# Altium PCB STM32_PCB.PcbDoc
Units mm, origin at the board's own origin, x right, y up, seen from the top; angles counter-clockwise.
Board outline 37.25 x 27 mm, 2 copper layers (Top Layer, Bottom Layer), stack 1.671 mm thick; 30 components, 26 nets, 137 pads, 120 vias.
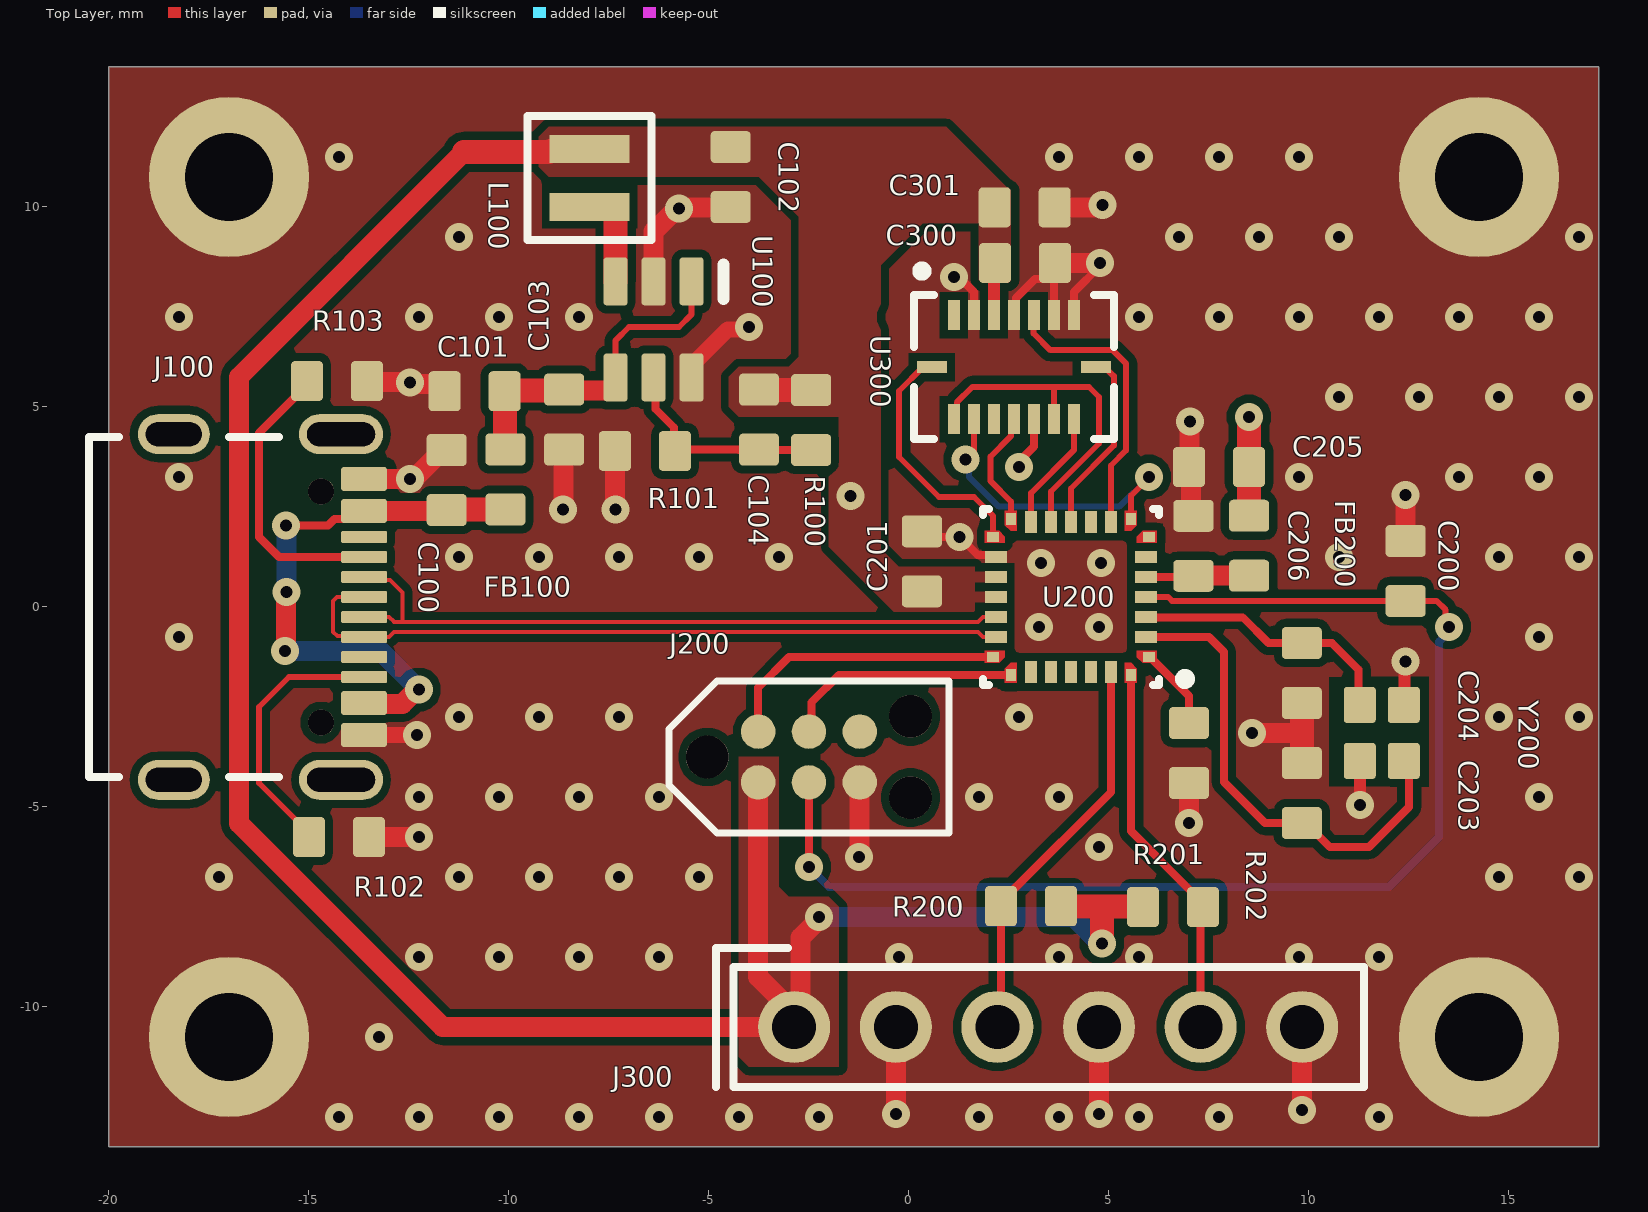
[diagram p0: Top Layer view]
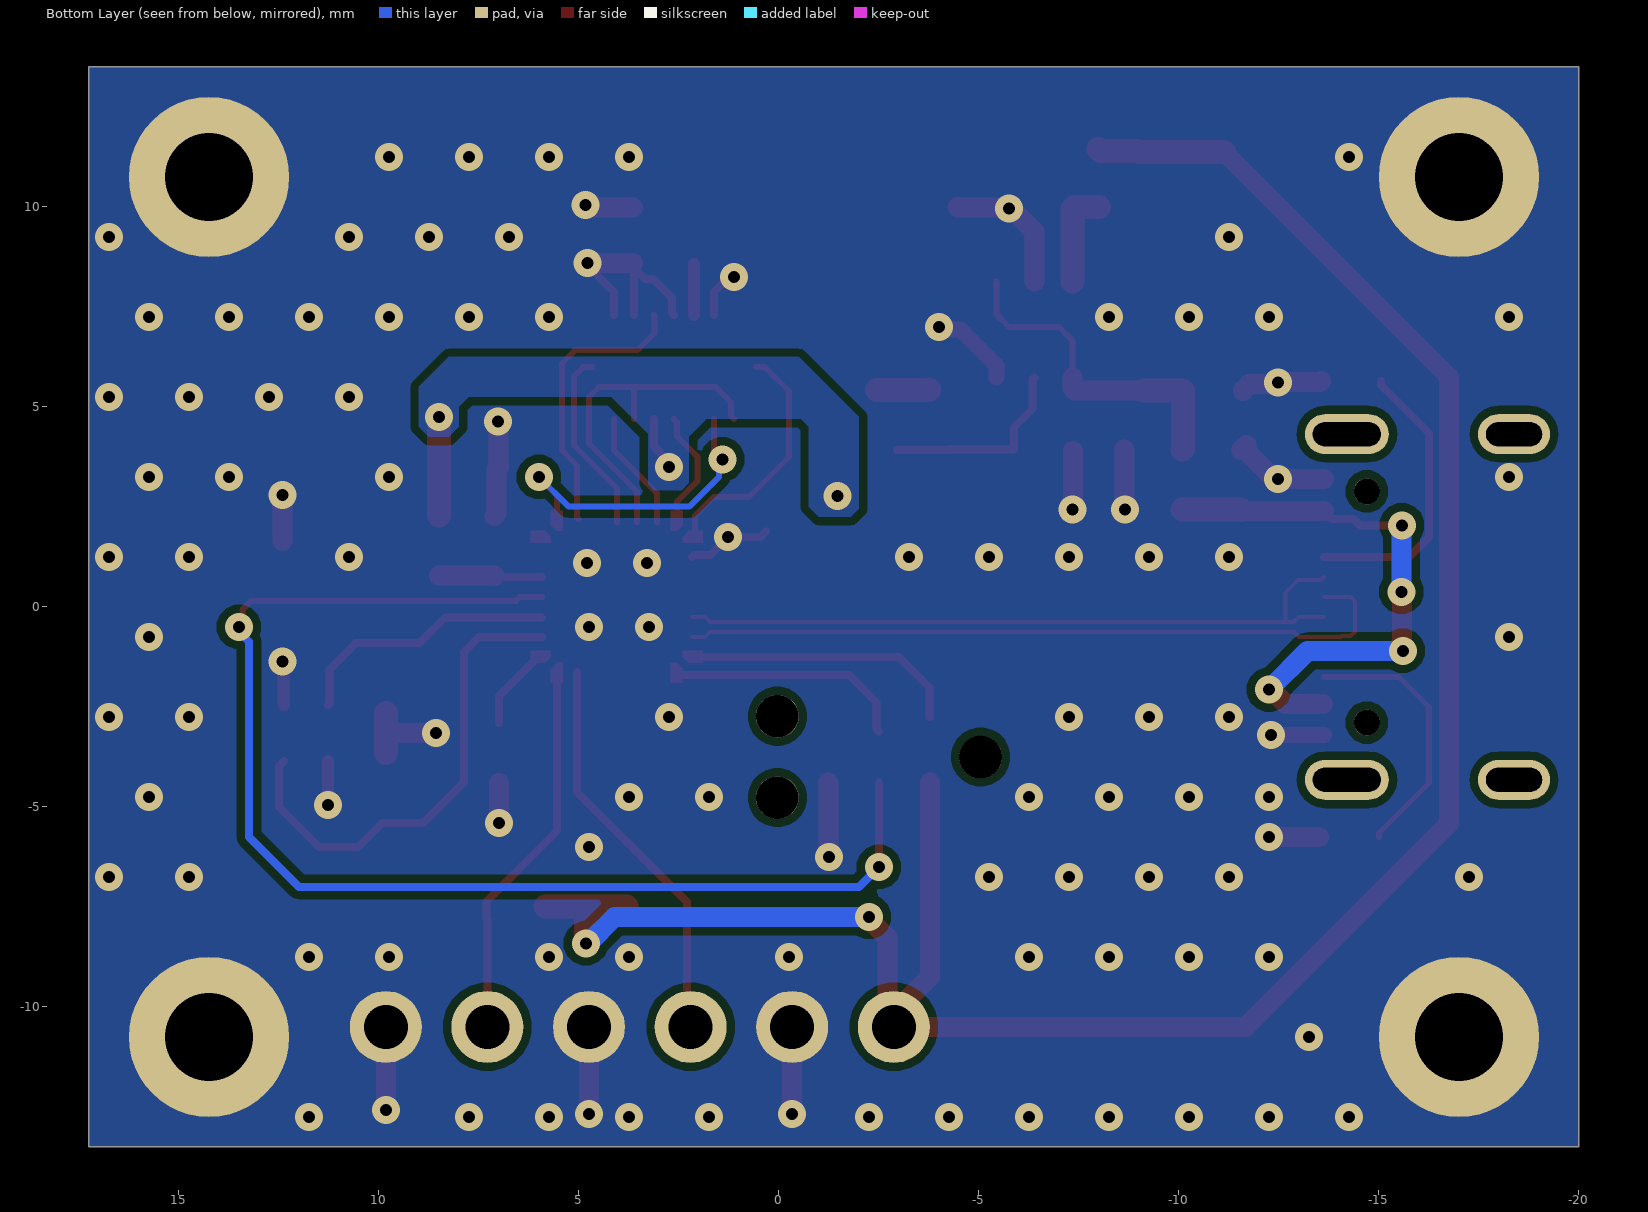
[diagram p1: Bottom Layer view, seen from below]
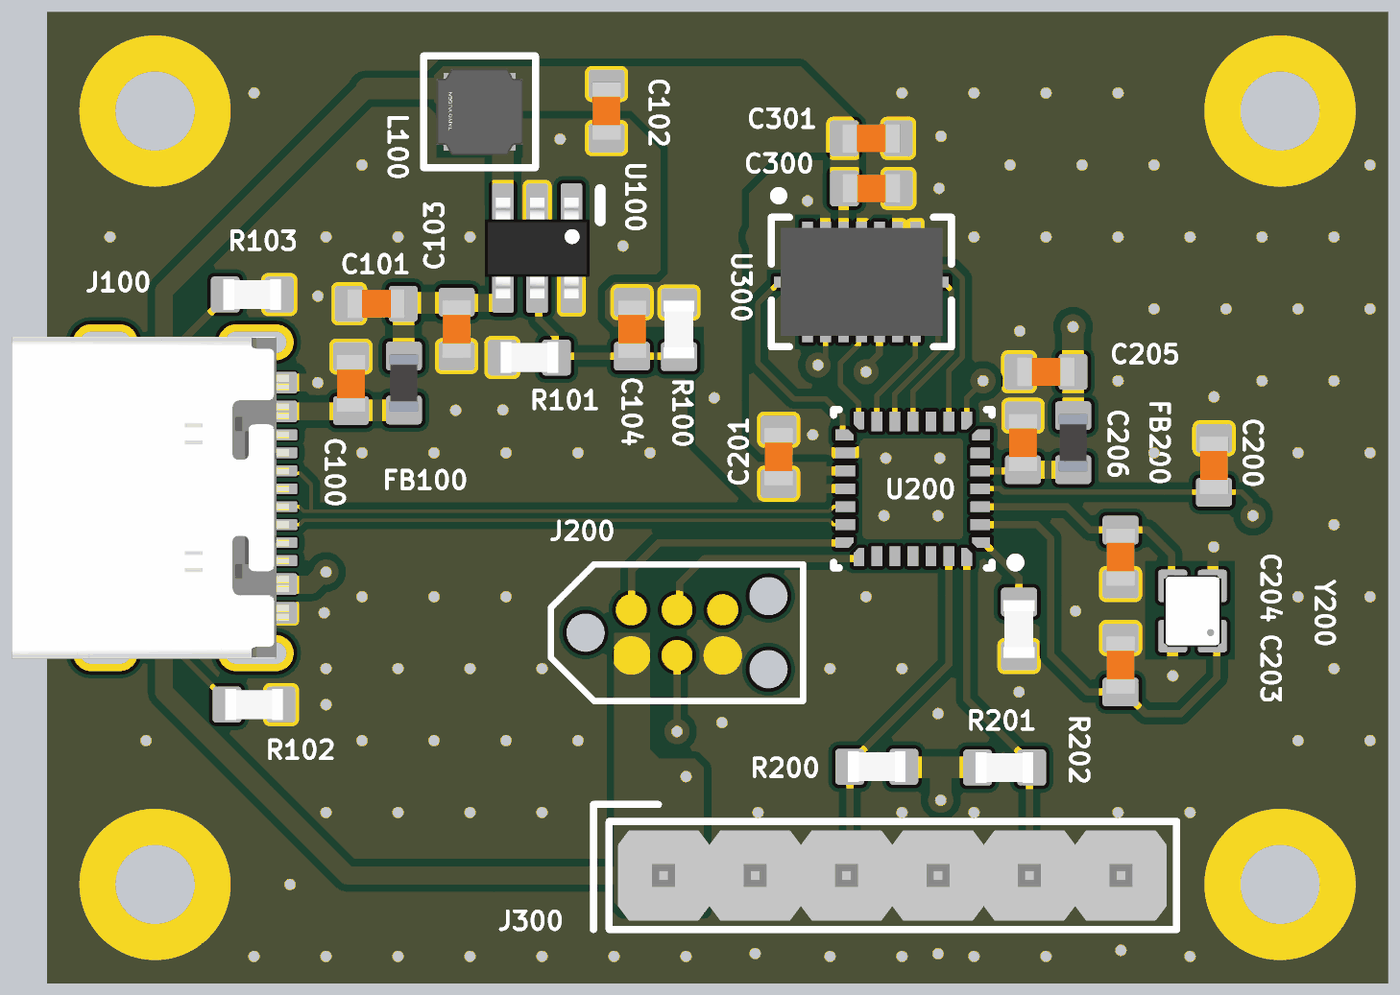
[diagram p2: 3D render of the assembled board from above, using the file's embedded part models]

## Layer stack, top to bottom
Top Solder: solder mask 0.0102, Solder Resist, Dk 3.5
Top Layer: signal copper 0.0356
Dielectric 1: dielectric 1.6, FR-4, Dk 4.1
Bottom Layer: signal copper 0.0356
Bottom Solder: solder mask 0.0102, Solder Resist, Dk 3.5

## Board outline
-20,-13.5 -20,13.5 17.25,13.5 17.25,-13.5

## Design rules (kind name [scope] priority, off if disabled: settings)
Clearance [All] p1: gap=0.2 ignorepadtopadclearanceinfootprint=TRUE except(0: Arc-Hole Track-Hole SMDPad-Hole THPad-Hole Via-Hole Fill-Hole Poly-Hole Region-Hole Text-Hole; 0.15: Arc-Arc Arc-Track Arc-SMDPad Track-Track Track-SMDPad SMDPad-SMDPad; 0.3: Arc-THPad Track-THPad SMDPad-THPad THPad-THPad)
DiffPairsRouting [All] p1: maxlimit=0.15 minlimit=0.15 mostfreqgap=0.15 toplayer_minwidth=0.1 toplayer_maxwidth=0.1 toplayer_prefwidth=0.1 bottomlayer_minwidth=0.1 bottomlayer_maxwidth=0.1 bottomlayer_prefwidth=0.1 maxuncoupledlength=12.7
MinimumSolderMaskSliver [All] p1: minsoldermaskwidth=0.127
PolygonConnect [All] p1: thpad.connectstyle=Relief thpad.reliefconductorwidth=0.254 thpad.reliefentries=4 thpad.polygonreliefangle="90 Angle" thpad.airgapwidth=0.254 smdpad.connectstyle=Relief smdpad.reliefconductorwidth=0.254 smdpad.reliefentries=4 smdpad.polygonreliefangle="90 Angle" smdpad.airgapwidth=0.254 via.connectstyle=Direct via.reliefconductorwidth=0.254 via.reliefentries=4 via.polygonreliefangle="90 Angle" via.airgapwidth=0.254
RoutingVias [All] p1: holewidth=0.3 width=0.7 viastyle="Through Hole" minholewidth=0.25 minwidth=0.6 maxholewidth=0.3 maxwidth=0.7
SilkToSilkClearance [All] p1: silktosilkclearance=0.127
SilkToSolderMaskClearance [IsPad] p1: minsilkscreentomaskgap=0.025 clearancetoexposedcopper=TRUE
SolderMaskExpansion [All] p1: expansion=0.102 istentingtop=FALSE
UnRoutedNet [All] p1: checkbadconnections=TRUE
Width [All] p1: maxlimit=1 minlimit=0.15 preferedwidth=0.3
25 further rules are at their usual default settings.

## Classes and differential pairs
differential pair class USB: USB_D
differential pair USB_D: +USB_D_P -USB_D_N

## Components (designator, comment, footprint, x,y, rotation, side; value= is the part's Value field where it differs from the comment)
C100 "100n" CAP_0603 -11.557,3.173 r270 top
C101 "100n" CAP_0603 -10.857,5.393 r0 top
C102 "4u7" CAP_0603 -4.458,10.75 r90 top
C103 "4u7" CAP_0603 -8.623,4.687 r90 top
C104 "22p" CAP_0603 -3.75,4.685 r90 top
C200 "100n" CAP_0603 12.416,0.9 r270 top
C201 "100n" CAP_0603 0.323,1.142 r270 top
C203 "10p" CAP_0603 9.82,-4.65 r270 top
C204 "10p" CAP_0603 9.82,-1.65 r90 top
C205 "100n" CAP_0603 7.75,3.5 r0 top
C206 "100n" CAP_0603 7.111,1.53 r270 top
C300 "100n" CAP_0603 2.9,8.6 r180 top
C301 "100n" CAP_0603 2.894,9.992 r180 top
FB100 "120R" FB_0603 -10.089,3.19 r90 top
FB200 "120R" FB_0603 8.505,1.531 r270 top
J100 "USB4105-GF-A-060" USB4105-GF-A-060 -16,0 r270 top
J200 "TC2030-NL" TC2030-NL-FP -2.5,-3.75 r0 top
J300 "G800W302018EU" G800W302018EU 3.48,-10.5 r90 top
L100 "10u" FP-NRH2412-MFG -7.986,10.729 r90 top
R100 "887k" RES_0603 -2.447,4.675 r90 top
R101 "280k" RES_0603 -6.601,3.898 r0 top
R102 "5k1" RES_0603 -14.25,-5.75 r180 top
R103 "5k1" RES_0603 -14.299,5.65 r180 top
R200 "5k1" RES_0603 3.051,-7.478 r0 top
R201 "5k1" RES_0603 6.6,-7.5 r180 top
R202 "5k1" RES_0603 7,-3.65 r270 top
U100 "LTC3405ES6#TRMPBF" SOT-23-6 -6.384,6.938 r180 top
U200 "STM32F042G6U6" STM-UFQFPN28_V 4.05,0.25 r180 top
U300 "BMI088" BMI088 2.623,5.997 r0 top
Y200 "FA-12824.0000MF10Z-W3" EPSON-FA-128_V 11.82,-3.15 r180 top

## Footprints (in the part's own frame and the unit in brackets; to place one, negate y for a bottom-side part, rotate by r counter-clockwise, add the part's x,y. Pads: shape width x height; smd on the part's side, far side on the other; paste and mask are expansions set on the pad)
BMI088 [mm]
  rect 0.3x0.75 smd: 1(-1.5,1.3) 2(-1,1.3) 3(-0.5,1.3) 4(0,1.3) 5(0.5,1.3) 6(1,1.3) 7(1.5,1.3) 9(1.5,-1.3) 10(1,-1.3) 11(0.5,-1.3) 12(0,-1.3) 13(-0.5,-1.3) 14(-1,-1.3) 15(-1.5,-1.3)
  rect 0.75x0.3 smd: 8(2.05,0) 16(-2.05,0)
  silkscreen extent -2.5,-1.8 2.5,2.51, body extent -2.25,-1.5 2.25,1.5, height 1.01
CAP_0603 [mm]
  rrect25% 0.8x1 smd: 1(-0.75,0) 2(0.75,0)
  body extent -0.8,-0.4 0.8,0.4, height 0.51
EPSON-FA-128_V [mm] "SMD, 4-Leads, Body 2x1.6mm, Pitch 1.45mm"
  rrect20% 0.8x0.9 smd: 1(-0.55,0.7) 2(-0.55,-0.7) 3(0.55,-0.7) 4(0.55,0.7)
  body extent -0.8,-1 0.8,1, height 0.4
FB_0603 [mm]
  rrect25% 0.8x1 smd: 1(-0.75,0) 2(0.75,0)
  body extent -0.8,-0.4 0.8,0.4, height 0.81
FP-NRH2412-MFG [mm]
  rect 0.7x2 smd paste+0 mask+0: 1(-0.725,0) 2(0.725,0)
  silkscreen extent -1.55,-1.55 1.55,1.55, body extent -1.35,-1.35 1.35,1.35, height 0.25
G800W302018EU [mm]
  round 1.8 hole 1.1 mask+0.07: 1(0,6.35) 2(0,3.81) 3(0,1.27) 4(0,-1.27) 5(0,-3.81) 6(0,-6.35)
  silkscreen extent -1.5,-7.9 1.97,8.3, body extent -1.25,-7.62 1.25,7.62, height 8.61
RES_0603 [mm]
  rrect25% 0.8x1 smd: 1(-0.75,0) 2(0.75,0)
  body extent -0.8,-0.43 0.8,0.43, height 0.52
SOT-23-6 [mm]
  rrect25% 0.6x1.2 smd: 1(-0.95,-1.2) 2(0,-1.2) 3(0.95,-1.2) 4(0.95,1.2) 5(0,1.2) 6(-0.95,1.2)
  silkscreen extent -1.75,-1.63 -1.75,-0.76, body extent -1.45,-1.4 1.45,1.4, height 1.45
STM-UFQFPN28_V [mm] "QFN, 28-Leads, Body 4.1x4.1mm, Pitch 0.5mm"
  rect 0.3x0.25 smd: 1(-1.95,1.5) 7(-1.95,-1.5) 15(1.95,-1.5) 21(1.95,1.5)
  rect 0.55x0.3 smd: 2(-1.875,1) 3(-1.875,0.5) 4(-1.875,0) 5(-1.875,-0.5) 6(-1.875,-1) 16(1.875,-1) 17(1.875,-0.5) 18(1.875,0) 19(1.875,0.5) 20(1.875,1)
  rect 0.25x0.3 smd: 8(-1.5,-1.95) 14(1.5,-1.95) 22(1.5,1.95) 28(-1.5,1.95)
  rect 0.3x0.55 smd: 9(-1,-1.875) 10(-0.5,-1.875) 11(0,-1.875) 12(0.5,-1.875) 13(1,-1.875) 23(1,1.875) 24(0.5,1.875) 25(0,1.875) 26(-0.5,1.875) 27(-1,1.875)
  Top Layer region: -2.15,-1.35 -1.65,-1.35 -1.65,-1.505 -1.795,-1.65 -2.15,-1.65
  Top Layer region: -1.35,-2.15 -1.35,-1.65 -1.505,-1.65 -1.65,-1.795 -1.65,-2.15
  Top Layer region: -1.35,2.15 -1.35,1.65 -1.505,1.65 -1.65,1.795 -1.65,2.15
  Top Layer region: 1.35,-2.15 1.35,-1.65 1.505,-1.65 1.65,-1.795 1.65,-2.15
  Top Layer region: 2.15,1.35 1.65,1.35 1.65,1.505 1.795,1.65 2.15,1.65
  Top Layer region: -2.15,1.35 -1.65,1.35 -1.65,1.505 -1.795,1.65 -2.15,1.65
  Top Layer region: 2.15,-1.35 1.65,-1.35 1.65,-1.505 1.795,-1.65 2.15,-1.65
  Top Layer region: 1.35,2.15 1.35,1.65 1.505,1.65 1.65,1.795 1.65,2.15
  silkscreen extent -2.98,-2.2 2.2,2.2, body extent -2.05,-2.05 2.05,2.05, height 0.6
TC2030-NL-FP [mil]
  round 33.98 smd paste-16.99: 1(-50,-25) 2(-50,25) 3(0,-25) 4(0,25) 5(50,-25) 6(50,25)
  round 42.01 hole 42.01 unplated: MH(-100,0) MH(100,-40) MH(100,40)
  silkscreen extent -138,-75 138,75
USB4105-GF-A-060 [mm]
  rrect25% 0.6x1.15 smd mask+0.05: A1B12(-3.2,2.378) A4B9(-2.4,2.378) B1A12(3.2,2.378) B4A9(2.4,2.378)
  rrect25% 0.3x1.15 smd mask+0.05: A5(-1.25,2.378) A6(-0.25,2.378) A7(0.25,2.378) A8(1.25,2.378) B5(1.75,2.378) B6(0.75,2.378) B7(-0.75,2.378) B8(-1.75,2.378)
  round 0.65 hole 0.65 unplated mask+0.05: MH(-2.89,1.303) MH(2.89,1.303)
  oval 1x2.1 hole 0.6 slot 1.7 at 90 deg: SH(-4.32,1.803) SH(4.32,1.803)
  oval 1x1.8 hole 0.6 slot 1.4 at 90 deg: SH(-4.32,-2.377) SH(4.32,-2.377)
  silkscreen extent -4.25,-4.5 4.25,0.25, body extent -4.47,-4.97 4.47,2.73, height 3.27

## Part data
C100 C101 C102 C103 C104 C200 C201 C205 C206: library part CAP_0603, "Capacitor SMD 0603"
C203 C204 C300 C301: library part CMP-001-00087-1, "Capacitor SMD 0603", Design Item ID=CAP_0603, Source=Schematic-Lib-PhilsLab.SchLib
FB100 FB200: library part FB_0603, "Ferrite Bead SMD 0603"
J100: "USB Connector Type C SMT 12 Pin", Manufacturer=GCT, Distributor Link=https://eu.mouser.com/ProductDetail/GCT/USB4105-GF-A-060?qs=QNEnbhJQKvY2mocwNJzgfA%3D%3D, Manufacturer Part Number=USB4105-GF-A-060
J200: library part CMP-002-00087-1, "Tag-Connect No-Solder SWD Debug Connector (No Legs) DO NOT PLACE", Manufacturer=Tag-Connect, Manufacturer Part Number=TC2030-NL-FP, Design Item ID=TC2030-NL, Source=Schematic-Lib-PhilsLab.SchLib
J300: library part CMP-002-00116-1, "Pin Header 6 Position 2.54mm Pitch", Manufacturer=Amphenol, Design Item ID=G800W302018EU, Manufacturer Part Number=G800W302018EU, Source=Schematic-Lib-PhilsLab.SchLib
L100: library part CMP-14484-000582-1, "Shielded Wirewound Inductor 10uH 20% 0.51A 0.72Ω SMD", Case/Package=Nonstandard, Current Rating=450mA, DC Resistance (DCR)=600mR, Inductance=10uH, Max DC Current=810mA, Max Operating Temperature=120°C, Min Operating Temperature=-25°C, Package Quantity=2500, Self Resonant Frequency=29MHz, Test Frequency=100kHz, Tolerance=20%, Core Material=Ferrite, Halogen Free="Halogen Free", Height=1.2mm, Height - Seated (Max)=0.047inch, Length=0.095inch, Mount="Surface Mount", Packaging="Tape and Reel", RoHS Compliant=Yes, Saturation Current=810mA, Shielding=Shielded, Termination=SMD/SMT, Width=0.095inch
R100 R101 R200 R201 R202: library part CMP-009-00183-1, "Resistor SMD 0603", Design Item ID=RES_0603, Source=Schematic-Lib-PhilsLab.SchLib
R102 R103: library part RES_0603, "Resistor SMD 0603"
U100: "1.5MHz, 300mA / Synchronous Step-Down / Regulator in ThinSOT", Manufacturer="Analog Devices", Manufacturer Part Number=LTC3405ES6#TRMPBF
U200: library part CMP-0304-00112-2, "ARM Cortex-M0 32-bit MCU, 32 KB Flash, 6 KB Internal RAM, 24 I/Os, 28-Pin UFQFPN, -40 to 85 degC, Tray", I/Os (High Current)=24, Manufacturer=STMicroelectronics, Operating Frequency(F) (Processor speed) (MHz)=48, Package Description="28-Pin Ultra Thin Fine Pitch Quad Flat No-Lead, 4 x 4 x 0.6 mm Body, 0.5 mm Pitch", Package Reference=UFQFPN28, Supply Voltage(Vcc) min (V)=2, ComponentLink1Description="Manufacturer URL", ComponentLink1URL=http://www.st.com/, ComponentLink2Description=Datasheet, ComponentLink2URL=http://www.st.com/st-web-ui/static/active/en/resource/technical/document/datasheet/DM00105814.pdf, Core="ARM Cortex-M0", DatasheetVersion="Rev. 5", FLASH Size (Prog) (kB)=32, Internal RAM Size (kB)=6, Mounting Technology="Surface Mount", Packing=Tray, PartNumber=STM32F042G6U6
U300: library part CMP-028-000011-1, "Inertial Measurement Unit IMU 6-Axis LGA", Manufacturer=Bosch, Design Item ID=BMI088, Manufacturer Part Number=BMI088, Source=Schematic-Lib-PhilsLab.SchLib
Y200: library part CMP-003-00028-1, "Crystal, 24 MHz, +/- 10 ppm, -20 to 75 degC, 4-Pin SMD, RoHS, Tape and Reel", Case/Package=SMD/SMT, Frequency=24MHz, Load Capacitance=12pF, Max Operating Temperature=75°C, Min Operating Temperature=-20°C, ESR=80, Mounting Technology=SMT, Pins=4, RoHS Compliant=Yes

## Free pads (board coordinates)
  round 4 hole 2.2: MH(14.25,10.75) MH1(14.25,-10.75) MH2(-17,-10.75) MH3(-17,10.75)

## Via types
v1: diameter 0.7, hole 0.3, Top Layer to Bottom Layer, tented both sides, 120 vias

## Nets (pads, with @x,y where several pads share a name; then routed paths per layer and width w, separated by ;. In a path a pad name is that pad's centre, name@x,y a point inside that pad or via, vN(x,y) a via of type N, cw(c..) or ccw(c..) an arc to the next point about the centre after c; other vN are vias at no path point)
+3V3: C102.2 C104.2 C201.2 C205.2 C300.2 C301.2 FB200.1 J200.1 J300.1 L100.2 R100.2 R200.2 R201.2 U200.17 U200.18 U300.3 U300.11 | length 64.5
  Top Layer w0.2: C300.2@2.123,8.573 C300.2 ; v1(2.75,3.5) 2.75,3.635 3.123,4.009 U300.11
  Top Layer w0.3: U300.3 C300.2@2.123,8.573
  Top Layer w0.5: -11.128,11.372 -16.75,5.75 -16.75,-5.407 -11.657,-10.5 J300.1 ; J200.1 -3.77,-9.248 -2.87,-10.148 J300.1 ; v1(-2.25,-7.75) -2.25,-7.804 -2.707,-8.261 -2.707,-10.337 J300.1
  Top Layer w0.6: -11.128,11.372 -8.994,11.372 -8.962,11.404 -8.036,11.404 L100.2 ; C104.2 -3.745,5.43 -2.452,5.43 R100.2 ; R200.2@3.812,-7.489 4.825,-7.489 ; v1(4.825,-8.408) 4.825,-7.489 ; R201.2@5.839,-7.489 4.825,-7.489 ; v1(8.5,4.75) C205.2 8.503,3.497 8.503,2.284 FB200.1
  Bottom Layer w0.5: v1(-2.25,-7.75) 4.113,-7.75 4.771,-8.408 v1(4.825,-8.408)
  other v1: -1.466,2.777
+3V3A: C206.2 FB200.2 U200.5 | length 2.6
  Top Layer w0.2: U200.5 7.081,0.75 C206.2
  Top Layer w0.5: C206.2 FB200.2@8.505,0.781
+5: C101.2 C103.2 FB100.2 U100.1 U100.4 | length 8.3
  Top Layer w0.15: U100.4 -7.334,6.666 -7,7 -5.75,7 -5.434,7.316 U100.1
  Top Layer w0.5: -9.123,5.415 -7.384,5.415 -7.334,5.465 U100.4
  Top Layer w0.6: C101.2 -10.085,5.415 -9.123,5.415 ; C101.2@-10.096,5.291 -10.096,3.946 FB100.2
+VUSB: C100.2 FB100.1 J100.A4B9 J100.B4A9 | length 14
  Top Layer w0.2: v1(-15.572,2.04) -14.522,2.04 -14.362,2.2 -13.822,2.2 J100.A4B9
  Top Layer w0.5: v1(-15.595,-1.097) -15.578,-1.079 -15.578,0.362 v1(-15.561,0.379) ; J100.A4B9 C100.2@-11.58,2.4 ; J100.B4A9@-13.599,-2.423 -12.662,-2.423 -12.305,-2.066 v1(-12.251,-2.066)
  Top Layer w0.6: C100.2 -11.549,2.431 -10.097,2.431 FB100.1
  Bottom Layer w0.5: v1(-15.595,-1.097) -13.219,-1.097 v1(-12.251,-2.066) ; v1(-15.572,2.04) -15.566,2.034 -15.566,0.385 v1(-15.561,0.379)
BOOT0: R202.1 U200.1 | length 2.1
  Top Layer w0.2: U200.1 6.025,-1.25 7,-2.225 R202.1
BUCK_SW: L100.1 U100.3 | length 2.5
  Top Layer w0.6: L100.1@-8,10 -7.384,10 -7.334,9.95 U100.3
BUCK_VFB: C104.1 R100.1 R101.2 U100.5 | length 4.9
  Top Layer w0.2: U100.5 -6.342,5.697 -6.342,4.955 -5.88,4.493 R101.2@-5.88,3.936 ; R101.2@-5.861,3.924 -5.85,3.935 -4.25,3.935 -4.245,3.93 -3.75,3.93 -2.952,3.93 R100.1@-2.947,3.925
GND: C100.1 C101.1 C102.1 C103.1 C200.1 C201.1 C203.1 C204.1 C205.1 C206.1 C300.1 C301.1 J100.A1B12 J100.B1A12 J200.5 J300.2 J300.4 J300.6 pad.MH pad.MH1 pad.MH2 pad.MH3 R101.1 R102.1 R103.1 R202.2 U100.2 U100.6 U200.16 U300.2 U300.4 U300.6 U300.7 Y200.2 Y200.4 | length 42.8
  Top Layer w0.2: C201.1 0.465,1.75 v1(1.269,1.75) 1.719,1.3 2.125,1.3 U200.16 ; v1(1.125,8.25) 1.25,8.25 1.623,7.877 U300.2 ; U300.4 2.673,7.347 2.673,7.725 3.148,8.2 3.35,8.2 C300.1@3.623,8.473 ; U300.6 C300.1@3.623,8.473 ; C300.1 3.623,8.573 C300.1@3.623,8.473 ; U300.7 4.123,7.873 4.782,8.532 v1(4.782,8.6)
  Top Layer w0.3: v1(11.27,-4.95) Y200.4 ; Y200.2 12.39,-2.43 12.39,-1.384 v1(12.41,-1.364)
  Top Layer w0.4: J100.B1A12 v1(-12.3,-3.2) ; U100.6 -5.434,6.038 -4.53,6.942 -4.059,6.942 v1(-4.001,6.999)
  Top Layer w0.5: J100.A1B12 v1(-12.48,3.2) -12.442,3.238 -12.342,3.238 -11.683,3.897 -11.683,4.049 C100.1 ; R103.1 -13.527,5.628 -12.497,5.628 v1(-12.475,5.606) -12.437,5.568 -11.757,5.568 -11.607,5.418 C101.1 ; R102.1 v1(-12.25,-5.75) ; v1(-8.648,2.431) -8.635,2.444 -8.635,3.924 C103.1 ; R101.1 -7.345,3.892 -7.345,2.447 v1(-7.339,2.441) ; U100.2 -6.384,9.384 -5.801,9.967 v1(-5.747,9.967) -5.731,9.983 -4.474,9.983 C102.1 ; v1(-1.25,-6.25) -1.24,-6.24 -1.24,-4.395 J200.5 ; v1(-0.33,-12.67) J300.2 ; C301.1 4.778,9.992 v1(4.834,10.048) ; C300.1 v1(4.782,8.6) ; v1(4.75,-12.676) J300.4@4.75,-11 ; v1(7,-5.4) R202.2 ; v1(7.022,4.631) 7.011,4.62 7.011,3.511 C205.1 7.056,3.444 7.056,2.336 C206.1 ; v1(8.57,-3.15) 9.822,-3.15 9.825,-3.152 ; v1(9.83,-12.58) J300.6 ; C200.1 v1(12.416,2.804)
  Top Layer w0.6: C204.1@9.82,-2.65 9.825,-2.654 9.825,-3.152 C203.1@9.825,-3.65
  other v1: -14.25,-12.75 -12.25,-12.75 -10.25,-12.75 -8.25,-12.75 -6.25,-12.75 -4.25,-12.75 -2.25,-12.75 1.75,-12.75 3.75,-12.75 5.75,-12.75 7.75,-12.75 11.75,-12.75 -13.25,-10.75 -12.25,-8.75 -10.25,-8.75 -8.25,-8.75 -6.25,-8.75 -0.25,-8.75 3.75,-8.75 5.75,-8.75 9.75,-8.75 11.75,-8.75 -17.25,-6.75 -11.25,-6.75 -9.25,-6.75 -7.25,-6.75 -5.25,-6.75 14.75,-6.75 16.75,-6.75 4.75,-6 -12.25,-4.75 -10.25,-4.75 -8.25,-4.75 -6.25,-4.75 1.75,-4.75 3.75,-4.75 15.75,-4.75 -11.25,-2.75 -9.25,-2.75 -7.25,-2.75 2.75,-2.75 14.75,-2.75 16.75,-2.75 -18.25,-0.75 15.75,-0.75 3.25,-0.5 4.75,-0.5 3.3,1.1 4.8,1.1 -11.25,1.25 -9.25,1.25 -7.25,1.25 -5.25,1.25 -3.25,1.25 10.75,1.25 14.75,1.25 16.75,1.25 -18.25,3.25 9.75,3.25 13.75,3.25 15.75,3.25 10.75,5.25 12.75,5.25 14.75,5.25 16.75,5.25 -18.25,7.25 -12.25,7.25 -10.25,7.25 -8.25,7.25 5.75,7.25 7.75,7.25 9.75,7.25 11.75,7.25 13.75,7.25 15.75,7.25 -11.25,9.25 6.75,9.25 8.75,9.25 10.75,9.25 16.75,9.25 -14.25,11.25 3.75,11.25 5.75,11.25 7.75,11.25 9.75,11.25
I2C_SCL: J300.3 R200.1 U200.27 | length 10.4
  Top Layer w0.2: J300.3@2.21,-11 2.301,-10.909 R200.1@2.301,-7.628 ; R200.1 2.301,-7.378 2.601,-7.078 2.602,-7.078 5.05,-4.63 U200.27
I2C_SDA: J300.5 R201.1 U200.28 | length 10
  Top Layer w0.2: U200.28 5.55,-5.604 7.046,-7.1 7.05,-7.1 7.317,-7.367 7.317,-7.783 7.29,-7.81 J300.5@7.29,-11
IMU_INT1: U200.15 U300.16 | length 6.2
  Top Layer w0.15: U300.16 0.348,5.997 -0.25,5.398 -0.25,3.75 0.75,2.75 1.627,2.75 2.1,2.277 U200.15
IMU_INT2: U200.14 U300.12 | length 2.9
  Top Layer w0.15: U200.14 2.55,2.634 2.041,3.143 2.041,3.761 2.548,4.269 2.548,4.622 U300.12
IMU_MISO: U200.12 U300.10 U300.15 | length 8.7
  Top Layer w0.15: U300.15 1.198,4.772 1.198,5.115 1.584,5.5 3.659,5.5 ; U200.12 3.55,2.886 4.75,4.086 4.75,5.25 4.5,5.5 3.659,5.5 ; U300.10 3.623,5.464 3.659,5.5
IMU_MOSI: U200.13 U300.9 | length 3
  Top Layer w0.15: U200.13 3.05,2.846 4.123,3.919 U300.9
IMU_NCC_ACC: U200.8 U300.14 | length 7.9
  Top Layer w0.15: v1(1.416,3.688) 1.495,3.768 1.495,3.787 1.623,3.915 U300.14 ; U200.8 5.55,2.781 6,3.231 v1(6,3.25)
  Bottom Layer w0.15: v1(1.416,3.688) 1.495,3.609 1.495,3.255 2.244,2.506 5.256,2.506 v1(6,3.25)
IMU_NCC_GYR: U200.9 U300.5 | length 7.1
  Top Layer w0.15: U300.5 3.118,7.291 3.118,6.838 3.536,6.42 5.093,6.42 5.423,6.09 5.423,3.911 5.05,3.538 5.05,2.227 U200.9@5.017,2.193
IMU_SCK: U200.11 U300.8 | length 4.6
  Top Layer w0.15: U200.11 4.05,2.962 5.123,4.036 5.123,5.772 4.898,5.997 U300.8
NRST: C200.2 J200.3 U200.4 | length 32
  Top Layer w0.15: U200.4 6.482,0.25 6.577,0.155 13.188,0.155 13.415,-0.072 13.415,-0.415 v1(13.5,-0.5)
  Top Layer w0.2: v1(-2.5,-6.5) J200.3
  Bottom Layer w0.2: v1(-2.5,-6.5) -2,-7 12,-7 13.25,-5.75 13.25,-0.867 13.5,-0.617 v1(13.5,-0.5)
OSC_IN: C203.2 U200.2 Y200.1 | length 12.3
  Top Layer w0.2: U200.2 7.5,-0.75 7.875,-1.125 7.875,-4.375 8.9,-5.4 C203.2 9.92,-5.4 10.52,-6 11.5,-6 12.5,-5 12.5,-3.98 Y200.1
OSC_OUT: C204.2 U200.3 Y200.3 | length 6.7
  Top Layer w0.2: U200.3@5.932,-0.257 8.342,-0.257 8.985,-0.9 10.57,-0.9 11.238,-1.567 11.238,-2.417 Y200.3
SWCLK: J200.4 U200.22 | length 6
  Top Layer w0.2: J200.4 -2.434,-3.049 -2.434,-2.384 -1.75,-1.7 U200.22
SWDIO: J200.2 U200.21 | length 6.9
  Top Layer w0.2: J200.2@-3.77,-2.75 -3.768,-2.748 -3.768,-2.018 -3,-1.25 U200.21
USB_CC1: J100.A5 R103.2 | length 7.2
  Top Layer w0.2: R103.2 -15.049,5.55 -16.25,4.349 -16.25,1.75 -15.75,1.25 J100.A5
USB_CC2: J100.B5 R102.2 | length 6.7
  Top Layer w0.15: R102.2 -15,-5.65 -16.25,-4.4 -16.25,-2.5 -15.5,-1.75 J100.B5
USB_D_N: J100.A7 J100.B7 U200.19 | length 17.7
  Top Layer w0.1: J100.A7 -13.373,-0.25 -13.198,-0.25 -13.137,-0.25 -12.998,-0.25 -12.88,-0.368 ; J100.B7 -13.552,0.68 -12.977,0.68 -12.664,0.366 -12.664,-0.375 1.725,-0.375 1.85,-0.25 U200.19 ; -12.872,-0.375 -12.674,-0.375
USB_D_P: J100.A6 J100.B6 U200.20 | length 18.3
  Top Layer w0.1: J100.A6 -14.295,0.25 -14.397,0.148 -14.397,-0.62 -14.289,-0.729 -14.069,-0.729 -14.048,-0.75 -12.998,-0.75 -12.872,-0.625 1.725,-0.625 1.85,-0.75 U200.20
pads on no net: J100.A8 J100.B8 J100.MH J100.SH J200.6 J200.MH U200.6 U200.7 U200.10 U200.23 U200.24 U200.25 U200.26 U300.1 U300.13

## Polygon pours and split planes (outlines as drawn)
GND on Top Layer "GND_L01_P027" (solid, remove dead copper, pour order 27): -20,-13.5 -20,13.5 17.25,13.5 17.25,-13.5
+3V3 on Top Layer "Top Layer-+3V3" (solid, remove dead copper, pour order 20): -4.5,5 -4.25,4.75 -1.75,4.75 -1.75,3.5 -2,3.25 -2,1.5 -0.38,-0.12 1,-0.12 1.63,-0.12 1.85,0.1 2.45,0.1 2.45,0.9 1.9,0.9 1.8,1 -0.25,1 -0.704,1.454 -0.704,8.546 0.342,9.592 1.75,9.592 1.75,8.159 1.809,8.1 2.485,8.1 2.55,8.159 2.55,10.427 2.485,10.492 2.444,10.492 0.936,12 -9,12 -9.25,11.75 -9.25,11 -9,10.75 -3.75,10.75 -2.75,9.75 -2.75,6.25 -3,6 -4.25,6 -4.5,5.75
+3V3 on Top Layer "+3V3_L01_P026" (solid, remove dead copper, pour order 26): -4.25,-3.75 -3.25,-3.75 -3.25,-7 -3,-7.25 -2,-7.25 -1.75,-7.5 -1.75,-11.5 -4,-11.5 -4.25,-11.25
GND on Bottom Layer "GND_L02_P025" (solid, remove dead copper, pour order 25): -20,-13.5 -20,13.5 17.25,13.5 17.25,-13.5
+3V3 on Bottom Layer "+3V3_L02_P023" (solid, remove dead copper, pour order 23): -0.75,2.5 -1,2.25 -1.798,2.25 -2,2.452 -2,4.75 -0.5,6.25 8.25,6.25 9,5.5 9,4.5 8.75,4.25 8.25,4.25 8,4.5 8,5 7.75,5.25 4.197,5.25 3.273,4.326 3.273,3.069 3.126,2.922 2.431,2.922 2.25,3.102 2.25,4.256 1.805,4.701 -0.549,4.701 -0.75,4.5

## Other copper
Top Layer:
  pour cut-out: 10.5,-1.75 13,-1.75 13,-4.5 10.5,-4.5

## Silkscreen, mask and mechanical layers (free items; w line width, h text height)
Mechanical 1:
  the board outline again, w0.2